# Altium PCB PCB1.PcbDoc
Units mil, origin at the board's own origin, x right, y up, seen from the top; angles counter-clockwise.
Board outline 2500 x 2500 mil, 4 copper layers (PWR, D1, D2, GND), stack 60.119 mil thick; 28 components, 55 nets, 182 pads, 105 vias.
Unrouted connection lines stored in the file: 1.
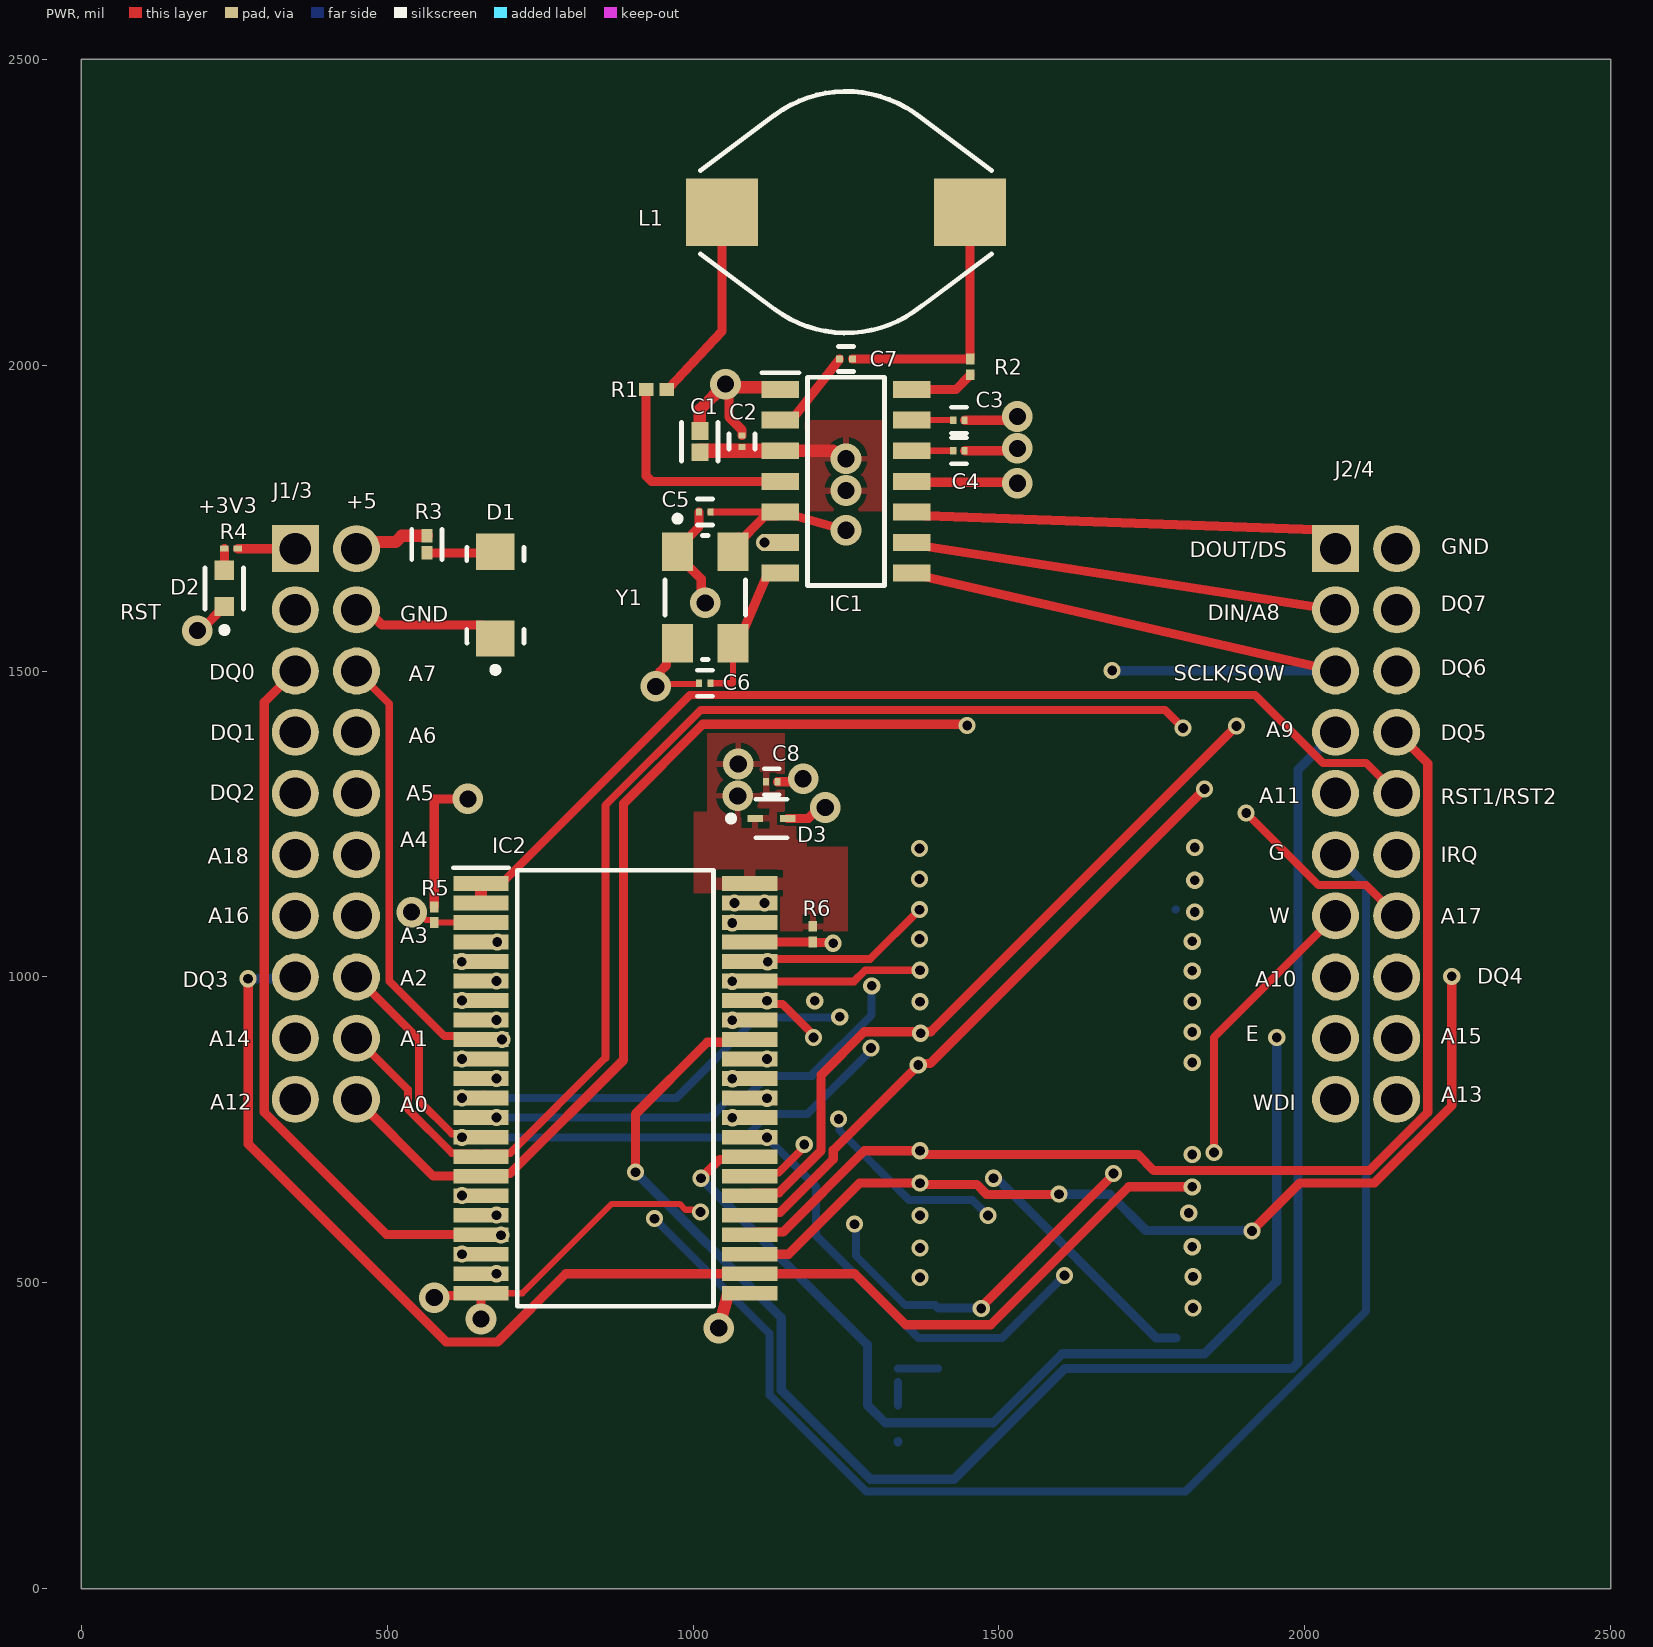
[diagram p0: PWR view]
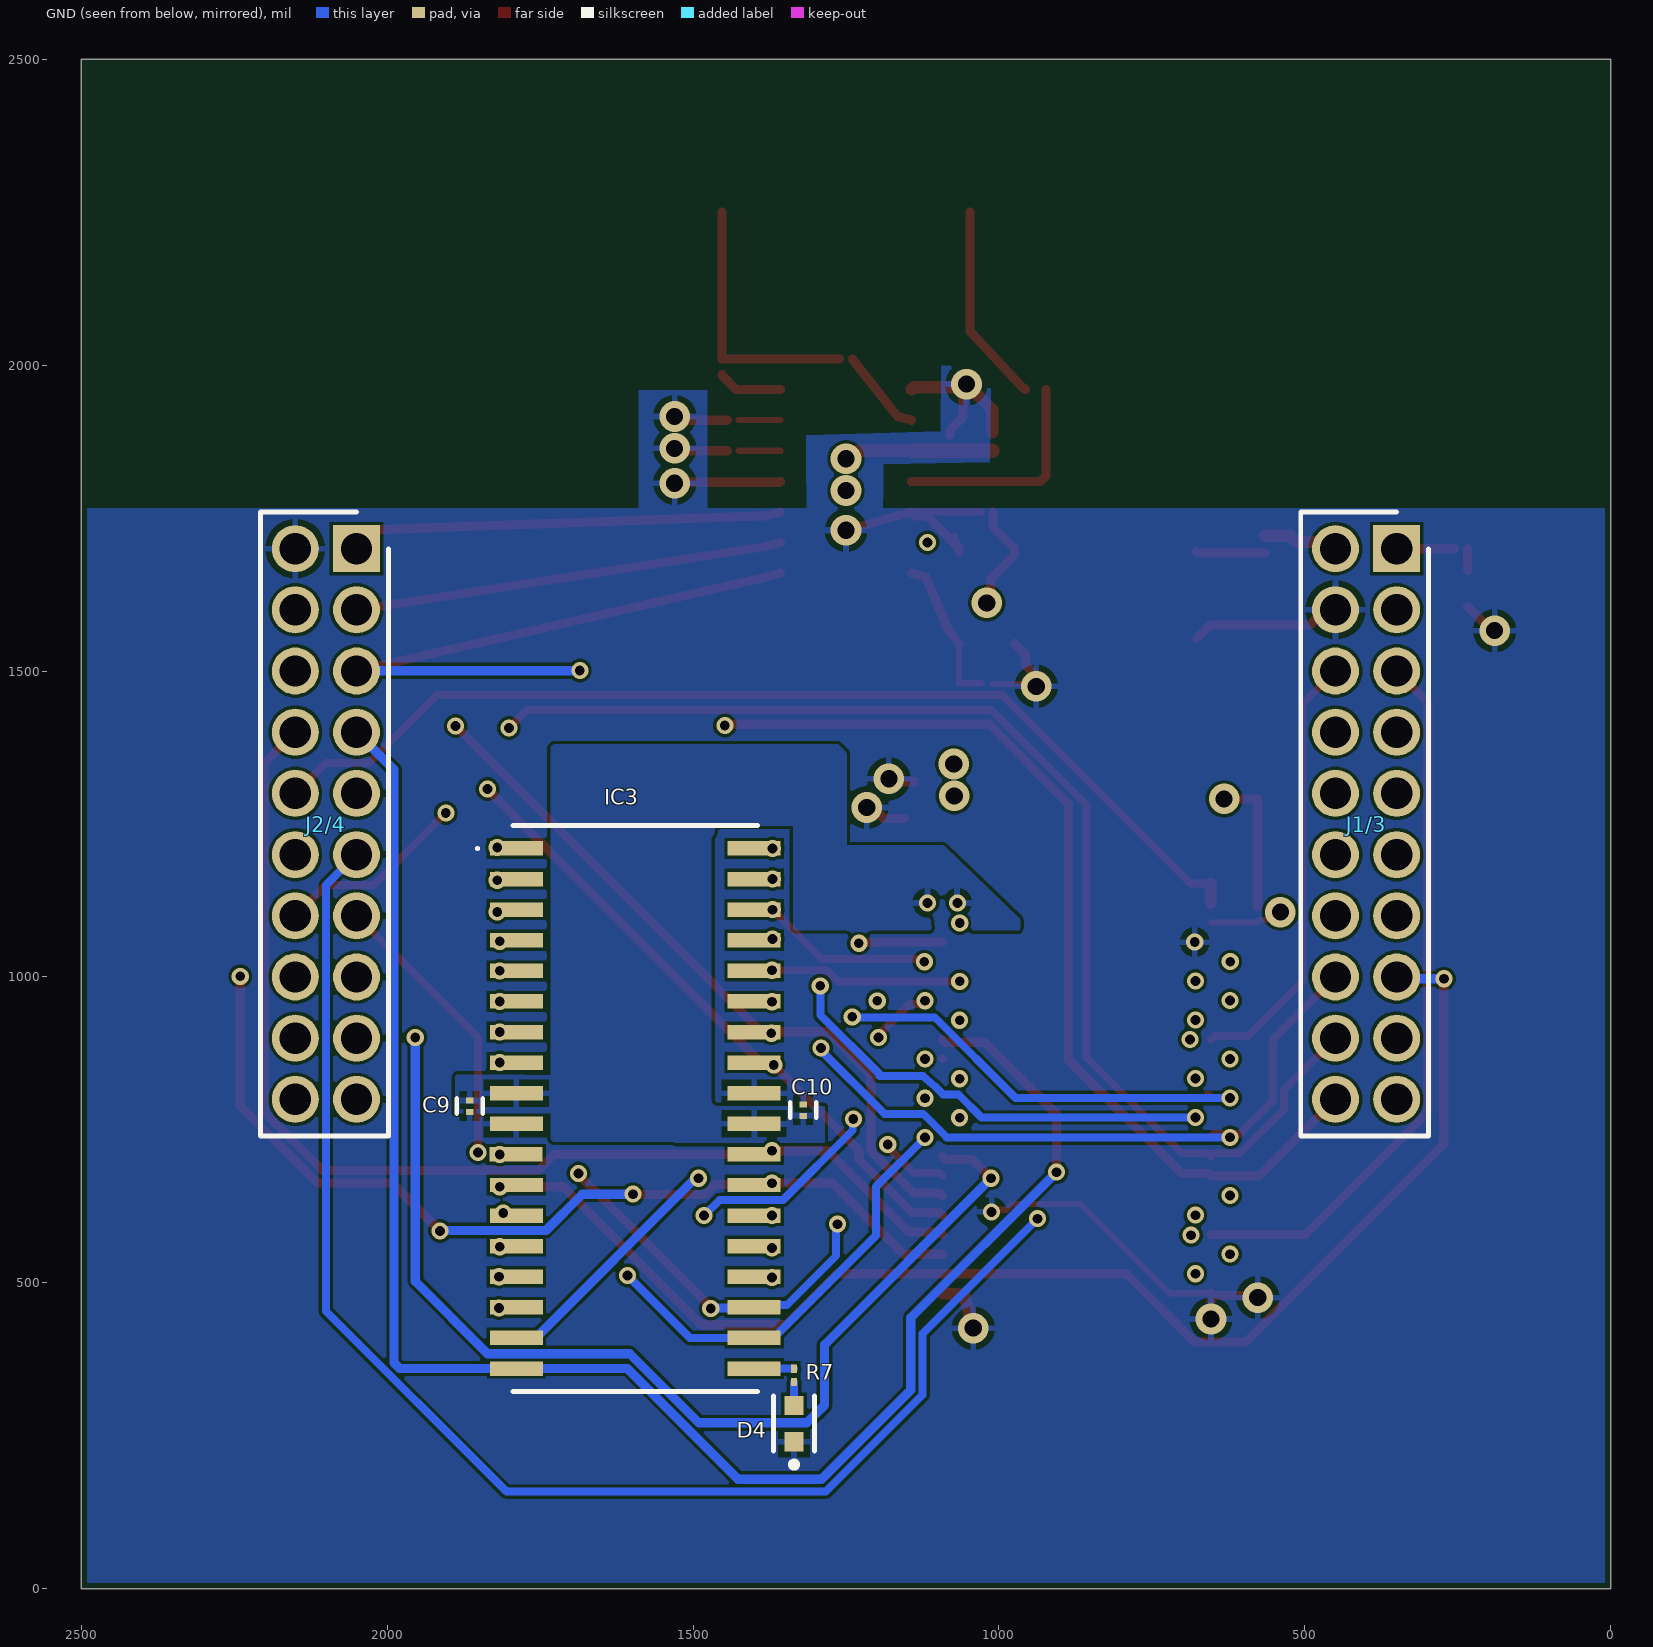
[diagram p1: GND view, seen from below]
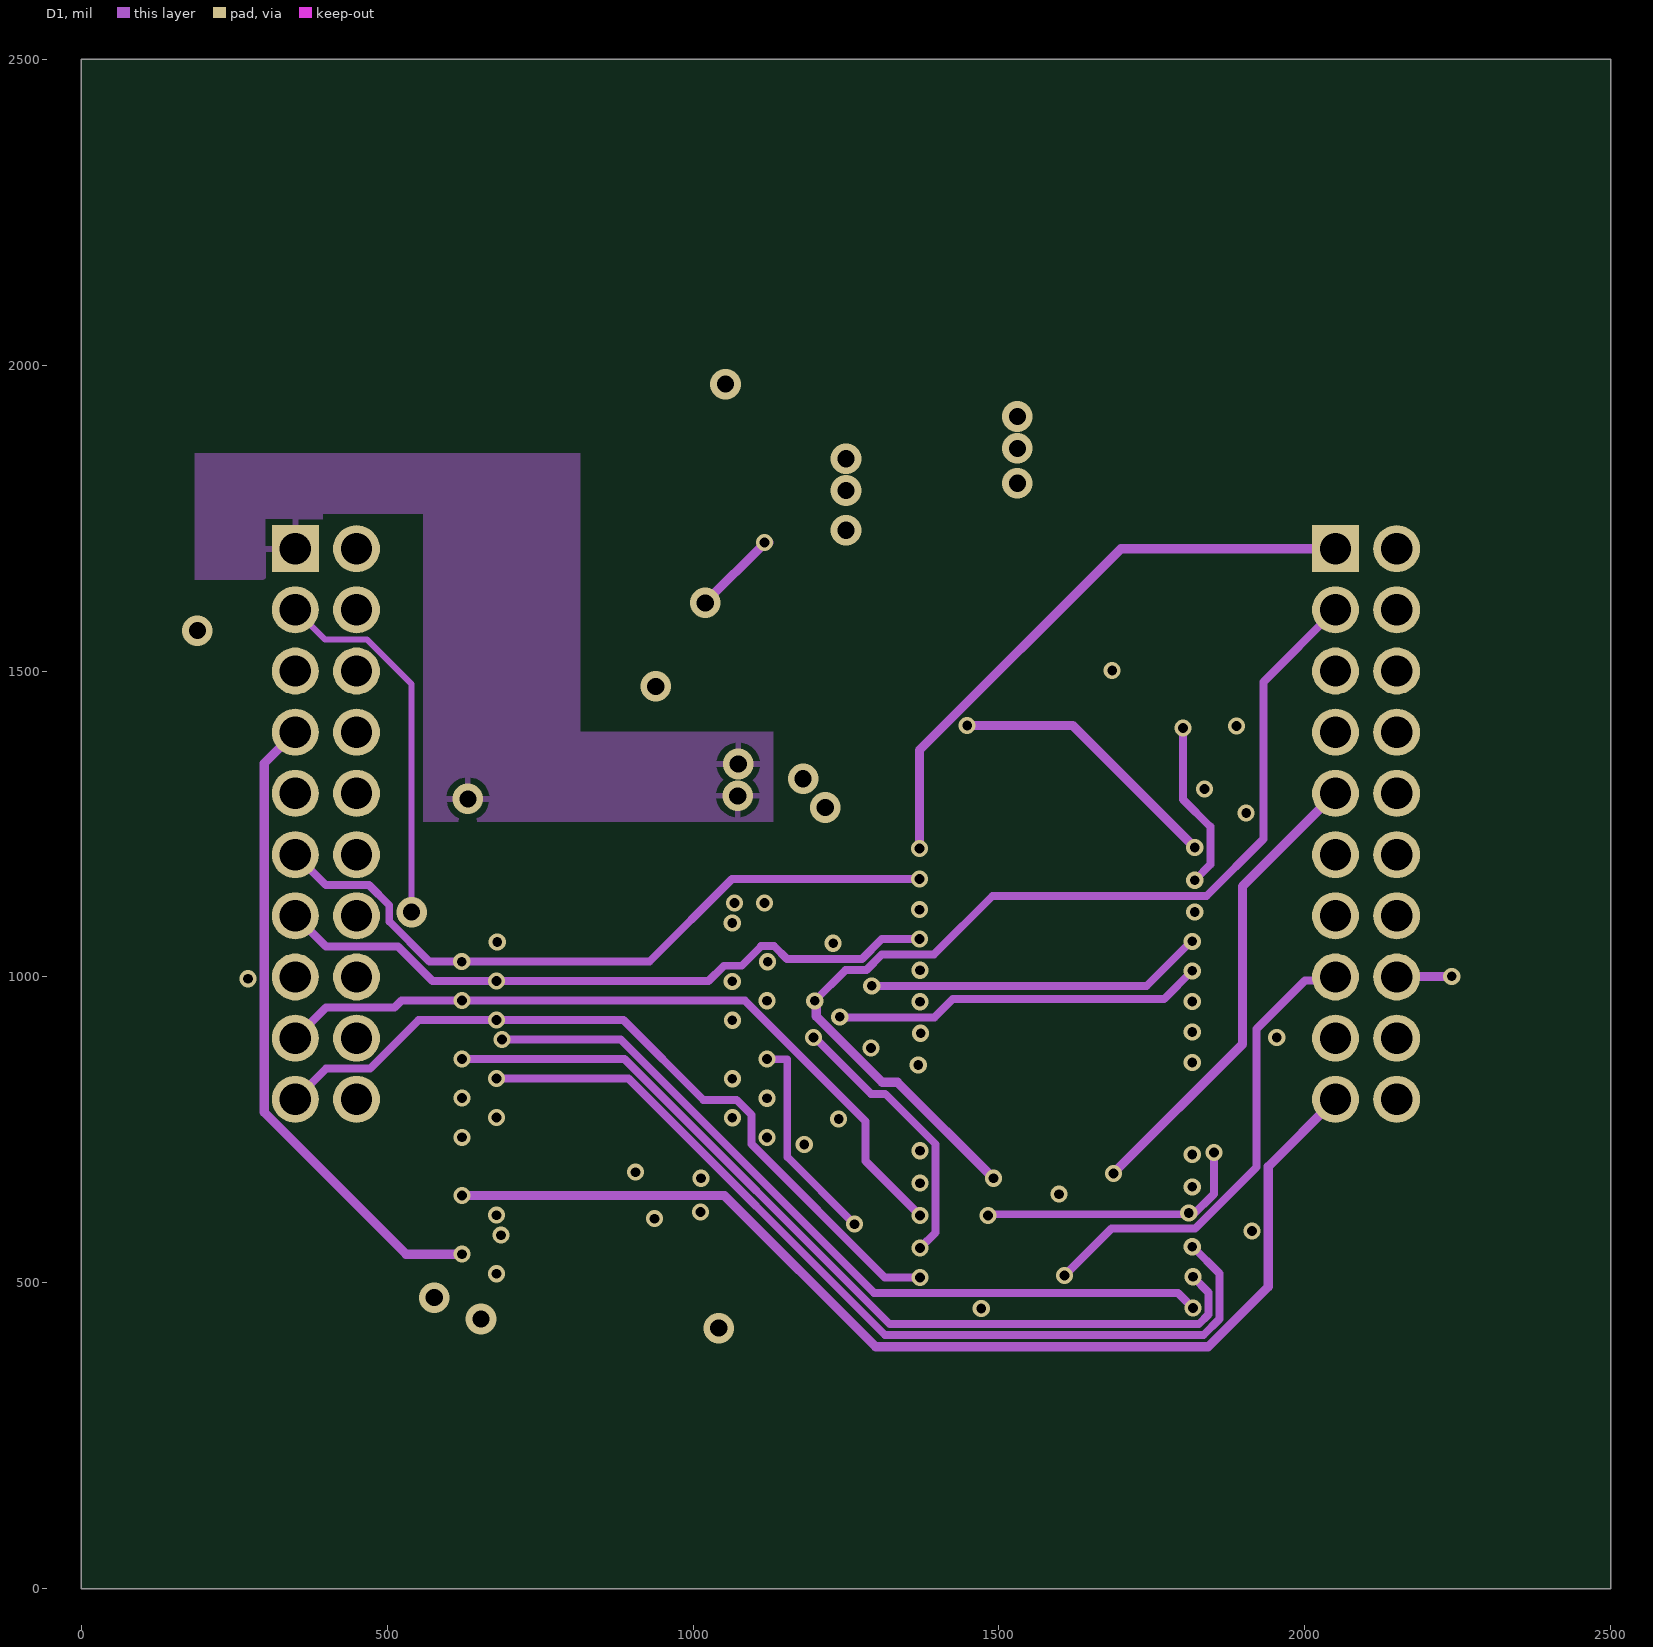
[diagram p2: D1]
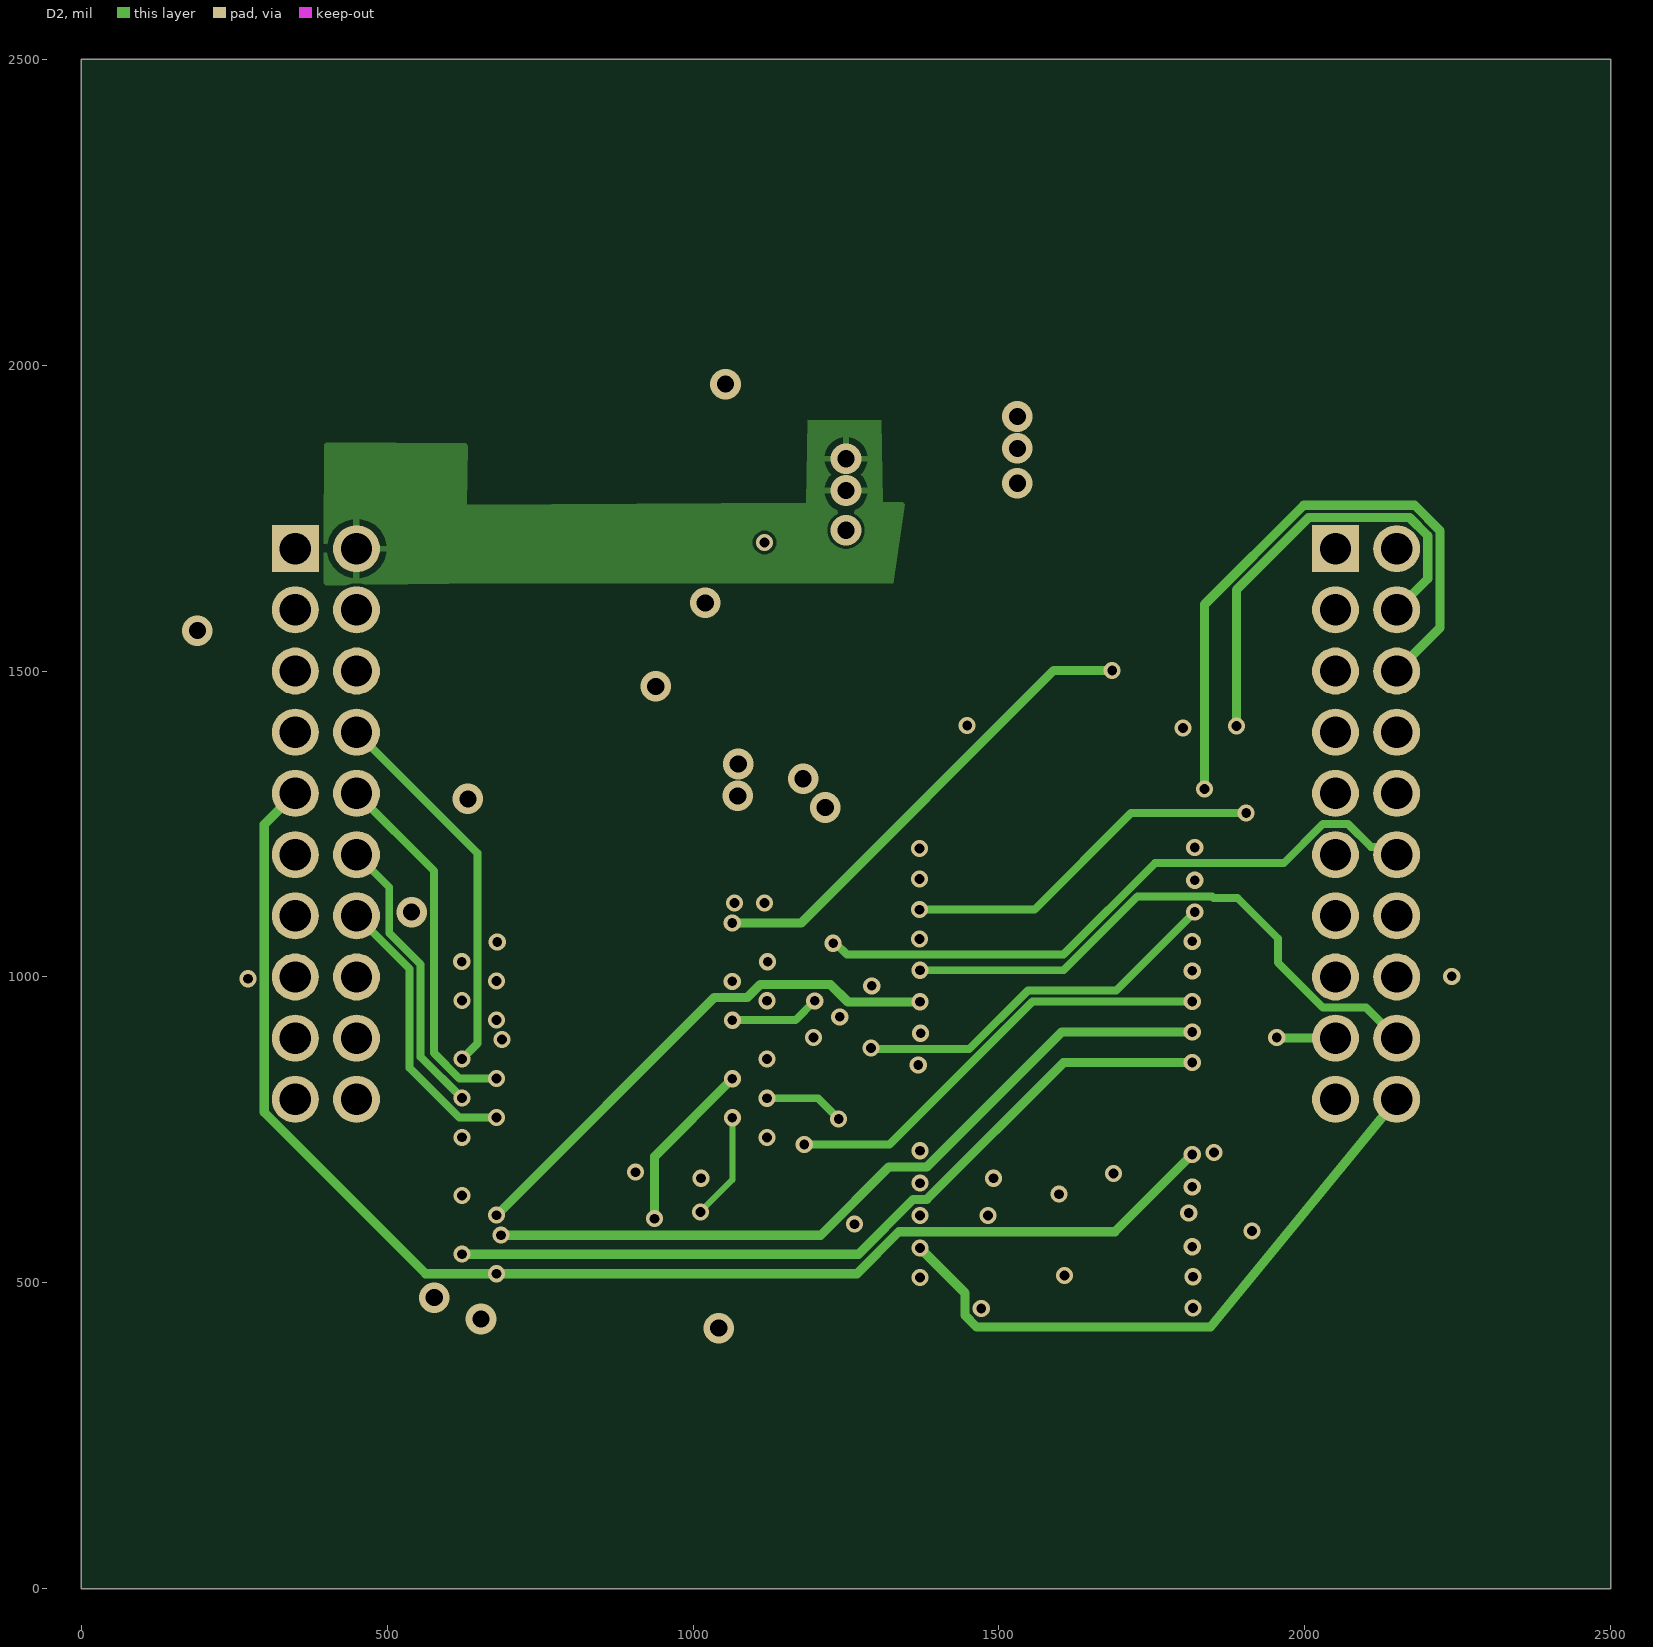
[diagram p3: D2]
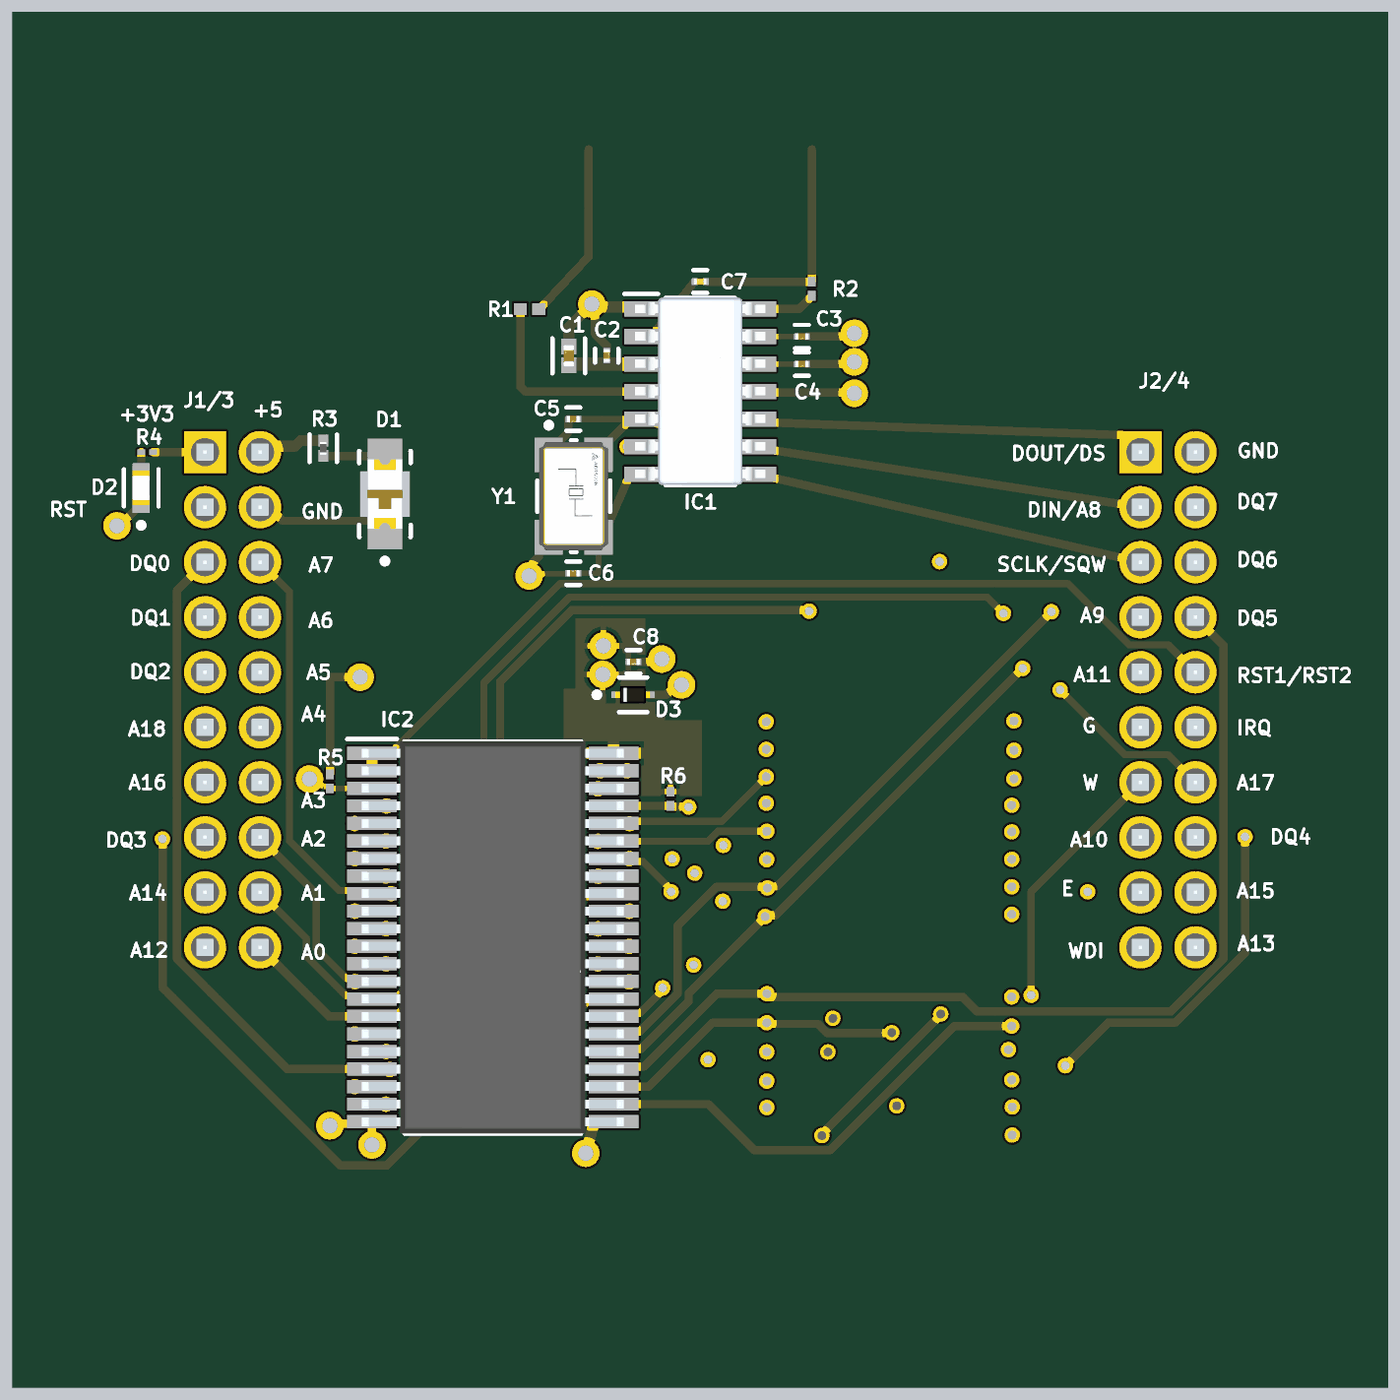
[diagram p4: 3D render of the assembled board from above, using the file's embedded part models]
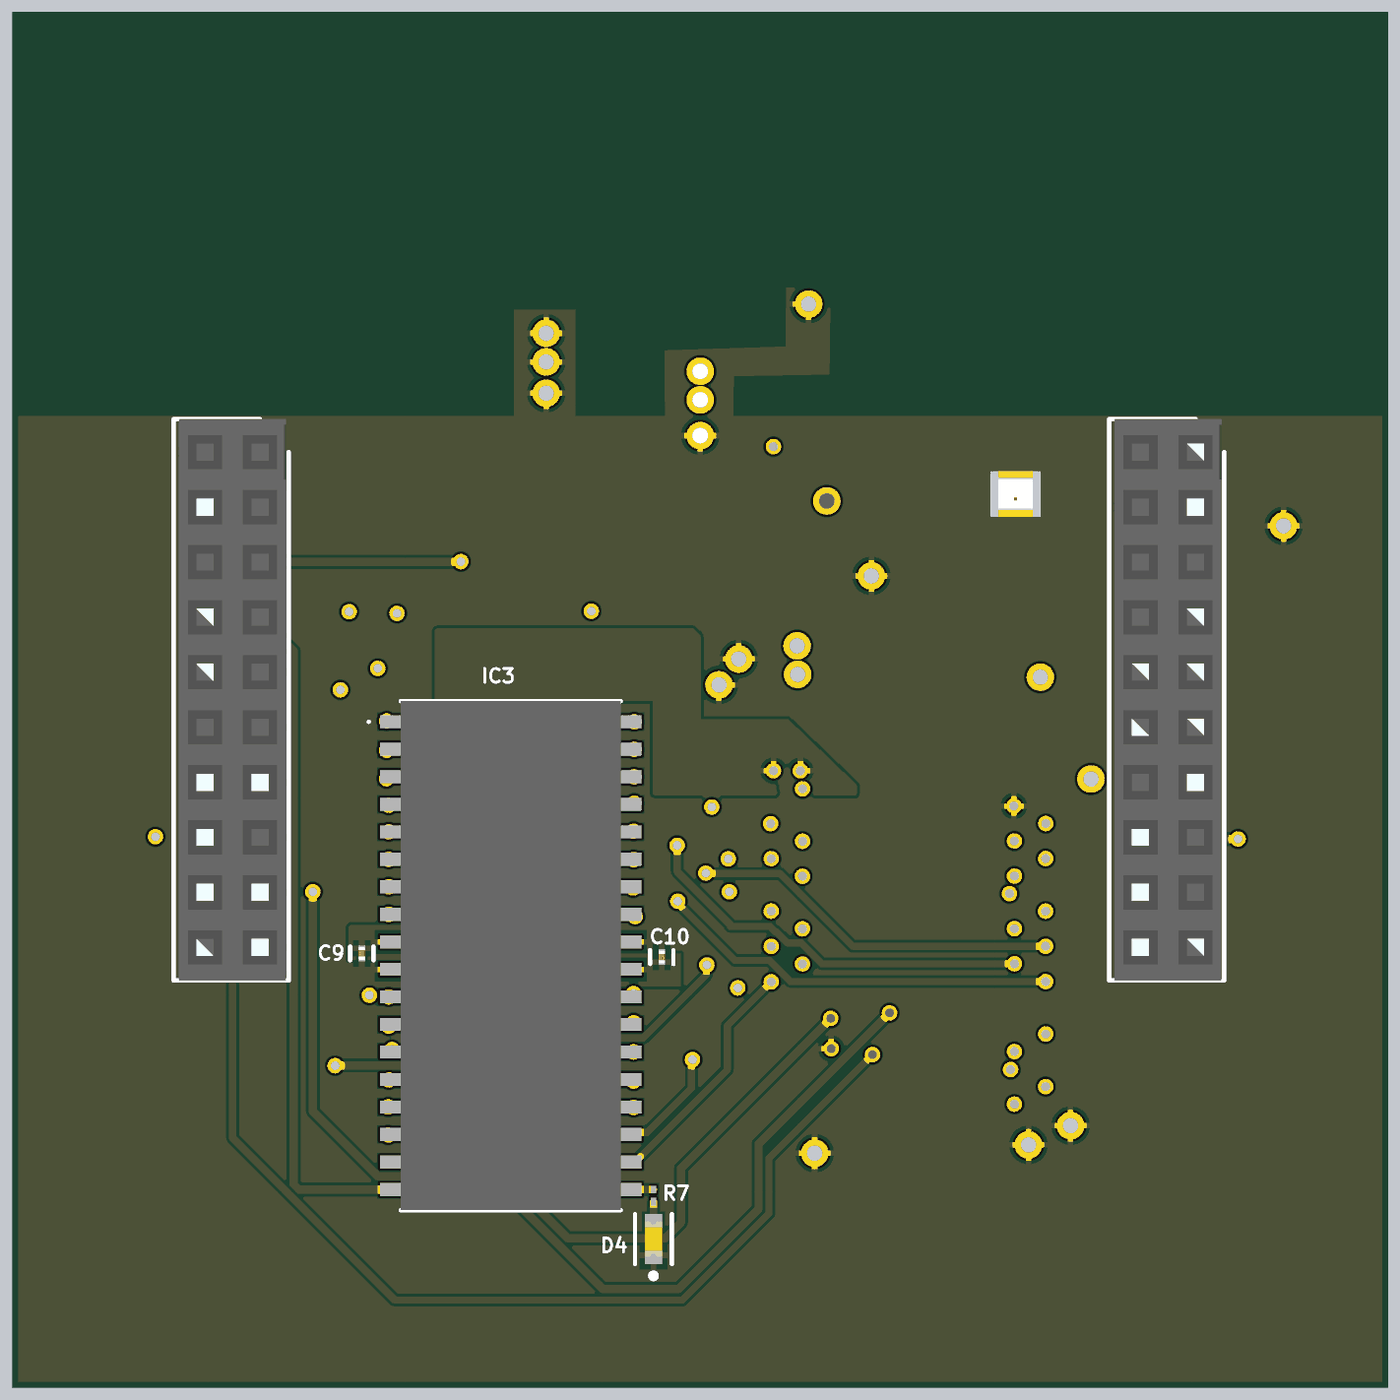
[diagram p5: 3D render of the assembled board from below, using the file's embedded part models]

## Layer stack, top to bottom
Top Solder: solder mask 0.4, Solder Resist, Dk 3.5
PWR: signal copper 0.689
Dielectric 2: prepreg 7.717, PP-006, Dk 4.56
D1: signal copper 1.378
Dielectric 1: dielectric 40.551, FR-4, Dk 4.6
D2: signal copper 1.378
Dielectric 3: prepreg 7.717, PP-006, Dk 4.56
GND: signal copper 0.689
Bottom Solder: solder mask 0.4, Solder Resist, Dk 3.5

## Board outline
0,2500 2500,2500 2500,0 0,0

## Design rules (kind name [scope] priority, off if disabled: settings)
BoardOutlineClearance [All] p1: gap=10 ignorepadtopadclearanceinfootprint=FALSE
Clearance [All] p1: gap=5 ignorepadtopadclearanceinfootprint=FALSE
MinimumSolderMaskSliver [All] p1: minsoldermaskwidth=1
PolygonConnect [All] p1: connectstyle=Relief reliefconductorwidth=10 reliefentries=4 polygonreliefangle="90 Angle" airgapwidth=10
RoutingVias [All] p1: holewidth=16 width=28 viastyle="Through Hole" minholewidth=10 minwidth=20 maxholewidth=28 maxwidth=50
SilkToSilkClearance [All] p1: silktosilkclearance=5
SilkToSolderMaskClearance [IsPad] p1: minsilkscreentomaskgap=5 clearancetoexposedcopper=TRUE
SolderMaskExpansion [All] p1: expansion=4 istentingtop=FALSE
SupplyNets "Schematic Supply Nets_3" [InNet('VOUT')] p1: voltage=0.000
SupplyNets "Schematic Supply Nets_2" [InNet('GND')] p2: voltage=0.000
SupplyNets "Schematic Supply Nets_1" [InNet('+3V3')] p3: voltage=0.000
SupplyNets "Schematic Supply Nets" [InNet('+5')] p4: voltage=0.000
Width [All] p1: maxlimit=30 minlimit=8 preferedwidth=10
27 further rules are at their usual default settings.

## Components (designator, comment, footprint, x,y, rotation, side; value= is the part's Value field where it differs from the comment)
C1 "GRM155R60J106ME44D" FP-GRM155-0_2-IPC_B 1011,1875 r90 top
C2 "GRM033R60J104KE19J" FP-GRM033-0_03-MFG 1080,1875.35 r90 top
C3 "GRM033R60J104KE19J" FP-GRM033-0_03-MFG 1434.65,1910 r0 top
C4 "GRM033R60J104KE19J" FP-GRM033-0_03-MFG 1434.65,1860 r0 top
C5 "GRM0335C1E3R0CA01D" FP-GRM033-0_03-MFG 1019.35,1760 r0 top
C6 "GRM0335C1E3R0CA01D" FP-GRM033-0_03-MFG 1019.35,1480 r180 top
C7 "CC0201KRX7R7BB332" FP-CC0201-BA-MFG 1250,2010 r180 top value="3.3 nF"
C8 "GRM033R60J104KE19J" FP-GRM033-0_03-MFG 1128.65,1319 r0 top
C9 "GRM033R60J104KE19J" FP-GRM033-0_03-MFG 1865,789 r270 bottom
C10 "GRM033R60J104KE19J" FP-GRM033-0_03-MFG 1320,782.35 r90 bottom
D1 "LTST-C230KRKT" FP-LTST-C230KRKT-MFG 677,1624 r90 top
D2 "LTST-C193TBKT-5A" FP-LTST-C193TBKT-5A-MFG 234,1635 r90 top
D3 "BAT41KFILM" FP-SOD-523-MFG 1128,1259 r0 top value=3pF
D4 "LTST-C190KFKT" FP-LTST-C190KFKT-MFG 1335,270 r90 bottom
IC1 "HTRC11001T_03EE,11" SOIC127P600X175-14N 1250,1810 r0 top
IC2 "M48T201V-85MH1F" SOP81P1210X305-44N 873,818 r0 top
IC3 "CY7S1049GE30-10VXI" CY7S1049GE3010VXI 1594.41,785 r270 bottom
J1/3 "SSW-110-23-F-D" RHDR20W79P254_2X10_2591X495X851P 350,1700 r90 bottom
J2/4 "SSW-110-23-F-D" RHDR20W79P254_2X10_2591X495X851P 2050,1700 r90 bottom
L1 "74456247" "WE-PD4_Type L" 51250,52250 r0 top
R1 "ERJ-U020R00X" RESC1005X40X25NL05T10 940,1960 r0 top
R2 "CRCW0201300KFNED" RESC0603X28X15NL05T05 1452.76,1997 r270 top
R3 "RC0603F511CS" FP-RC0603-IPC_A 565,1707 r270 top
R4 "CRCW0201470RFKED" RESC0603X28X15LL05T05 245,1700 r180 top
R5 "CRCW02014K70JNED" RESC0603X28X15NL05T05 577,1101.8 r90 top
R6 "CRCW02014K70JNED" RESC0603X28X15NL05T05 1196,1070 r90 top
R7 "CRCW0201470RFKED" RESC0603X28X15LL05T05 1335,348.83 r90 bottom
Y1 "ABM3BAIG-16.000MHZ-12-D4Z-T" FP-ABM3BAIG-MFG 1020,1620 r270 top

## Footprints (in the part's own frame and the unit in brackets; to place one, negate y for a bottom-side part, rotate by r counter-clockwise, add the part's x,y. Pads: shape width x height; smd on the part's side, far side on the other; paste and mask are expansions set on the pad)
CY7S1049GE3010VXI [mm]
  rect 0.6x2.2 smd: 1(-10.795,-4.938) 2(-9.525,-4.938) 3(-8.255,-4.938) 4(-6.985,-4.938) 5(-5.715,-4.938) 6(-4.445,-4.938) 7(-3.175,-4.938) 8(-1.905,-4.938) 9(-0.635,-4.938) 10(0.635,-4.938) 11(1.905,-4.943) 12(3.175,-4.938) 13(4.445,-4.938) 14(5.715,-4.938) 15(6.985,-4.938) 16(8.255,-4.938) 17(9.525,-4.938) 18(10.795,-4.938) 19(10.795,4.938) 20(9.525,4.938) 21(8.255,4.938) 22(6.985,4.938) 23(5.715,4.938) 24(4.445,4.938) 25(3.175,4.938) 26(1.905,4.938) 27(0.635,4.938) 28(-0.635,4.938) 29(-1.905,4.938) 30(-3.175,4.938) 31(-4.445,4.938) 32(-5.715,4.938) 33(-6.985,4.938) 34(-8.255,4.938) 35(-9.525,4.938) 36(-10.795,4.938)
  silkscreen extent -11.75,-6.6 11.75,5.08, body extent -11.75,-5.08 11.75,5.08, height 3.86
FP-ABM3BAIG-MFG [mm]
  rect 1.6x1.3 smd paste+0 mask+0: 1(-1.9,-1.15) 2(1.9,-1.15) 3(1.9,1.15) 4(-1.9,1.15)
  silkscreen extent -3.4,-1.68 2.58,1.68, body extent -2.8,-1.9 2.8,1.9, height 0.25
FP-CC0201-BA-MFG [mm]
  rect 0.28x0.3 smd paste+0 mask+0: 1(-0.265,0) 2(0.265,0)
  silkscreen extent -0.32,-0.53 0.32,0.53, body extent -0.51,-0.27 0.51,0.27, height 0.25
FP-GRM033-0_03-MFG [mm]
  rect 0.25x0.3 smd paste+0 mask+0: 1(-0.238,0) 2(0.238,0)
  silkscreen extent -0.32,-0.54 0.32,0.54, body extent -0.46,-0.27 0.46,0.27, height 0.25
FP-GRM155-0_2-IPC_B [mil]
  rect 28.67x27.8 smd paste+0 mask+0: 1(-17.28,0) 2(17.28,0)
  silkscreen extent -32,-30 32,30, body extent -38,-20 38,20, height 10
FP-LTST-C190KFKT-MFG [mm]
  rect 0.8x0.8 smd paste+0 mask+0: 1(-0.75,0) 2(0.75,0)
  silkscreen extent -1.82,-0.85 1.15,0.85, body extent -0.8,-0.4 0.8,0.4, height 0.9
FP-LTST-C193TBKT-5A-MFG [mm]
  rect 0.8x0.8 smd paste+0 mask+0: 1(-0.75,0) 2(0.75,0)
  silkscreen extent -1.85,-0.8 0.85,0.8, body extent -1.25,-0.55 1.25,0.55, height 0.25
FP-LTST-C230KRKT-MFG [mm]
  rect 1.5x1.6 smd paste+0 mask+0: 1(-1.8,0) 2(1.8,0)
  silkscreen extent -3.22,-1.19 1.99,1.19, body extent -2.65,-0.95 2.65,0.95, height 0.25
FP-RC0603-IPC_A [mil]
  rect 21.82x18.22 smd paste+0 mask+0: 1(-13.95,0) 2(13.95,0)
  silkscreen extent -25,-25 25,25, body extent -33,-17 33,17, height 10
FP-SOD-523-MFG [mm]
  rect 0.65x0.3 smd paste+0 mask+0: 1(-0.675,0) 2(0.675,0)
  silkscreen extent -1.8,-0.8 0.65,0.8, body extent -1.1,-0.55 1.1,0.55, height 0.25
RESC0603X28X15LL05T05 [mm] "Chip Resistor, 2-Leads, Body 0.60x0.30mm, IPC High Density"
  rect 0.35x0.25 smd: 1(-0.275,0) 2(0.275,0)
  body extent -0.33,-0.17 0.32,0.18, height 0.28
RESC0603X28X15NL05T05 [mm] "Chip Resistor, 2-Leads, Body 0.60x0.30mm, IPC Medium Density"
  rect 0.45x0.35 smd: 1(-0.325,0) 2(0.325,0)
  body extent -0.33,-0.17 0.33,0.18, height 0.28
RESC1005X40X25NL05T10 [mm] "Chip Resistor, 2-Leads, Body 1.00x0.50mm, IPC Medium Density"
  rect 0.6x0.55 smd: 1(-0.425,0) 2(0.425,0)
  body extent -0.53,-0.27 0.53,0.28, height 0.4
RHDR20W79P254_2X10_2591X495X851P [mm]
  rect 1.95x1.95 hole 1.3: 1(0,0)
  round 1.95 hole 1.3: 2(0,2.54) 3(-2.54,0) 4(-2.54,2.54) 5(-5.08,0) 6(-5.08,2.54) 7(-7.62,0) 8(-7.62,2.54) 9(-10.16,0) 10(-10.16,2.54) 11(-12.7,0) 12(-12.7,2.54) 13(-15.24,0) 14(-15.24,2.54) 15(-17.78,0) 16(-17.78,2.54) 17(-20.32,0) 18(-20.32,2.54) 19(-22.86,0) 20(-22.86,2.54)
  silkscreen extent -24.39,-1.33 1.53,3.99, body extent -24.39,-1.21 1.53,3.75, height 8.51
SOIC127P600X175-14N [mm]
  rect 1.55x0.7 smd: 1(-2.725,3.81) 2(-2.725,2.54) 3(-2.725,1.27) 4(-2.725,0) 5(-2.725,-1.27) 6(-2.725,-2.54) 7(-2.725,-3.81) 8(2.725,-3.81) 9(2.725,-2.54) 10(2.725,-1.27) 11(2.725,0) 12(2.725,1.27) 13(2.725,2.54) 14(2.725,3.81)
  silkscreen extent -3.5,-4.33 1.6,4.51, body extent -3,-4.31 3,4.34, height 1.56
SOP81P1210X305-44N [mm]
  rect 2.3x0.61 smd: 1(-5.575,8.505) 2(-5.575,7.695) 3(-5.575,6.885) 4(-5.575,6.075) 5(-5.575,5.265) 6(-5.575,4.455) 7(-5.575,3.645) 8(-5.575,2.835) 9(-5.575,2.025) 10(-5.575,1.215) 11(-5.575,0.405) 12(-5.575,-0.405) 13(-5.575,-1.215) 14(-5.575,-2.025) 15(-5.575,-2.835) 16(-5.575,-3.645) 17(-5.575,-4.455) 18(-5.575,-5.265) 19(-5.575,-6.075) 20(-5.575,-6.885) 21(-5.575,-7.695) 22(-5.575,-8.505) 23(5.575,-8.505) 24(5.575,-7.695) 25(5.575,-6.885) 26(5.575,-6.075) 27(5.575,-5.265) 28(5.575,-4.455) 29(5.575,-3.645) 30(5.575,-2.835) 31(5.575,-2.025) 32(5.575,-1.215) 33(5.575,-0.405) 34(5.575,0.405) 35(5.575,1.215) 36(5.575,2.025) 37(5.575,2.835) 38(5.575,3.645) 39(5.575,4.455) 40(5.575,5.265) 41(5.575,6.075) 42(5.575,6.885) 43(5.575,7.695) 44(5.575,8.505)
  silkscreen extent -6.73,-9.05 4.08,9.16, body extent -6.05,-9.05 6.05,9.05, height 3.05
"WE-PD4_Type L" [mm] "SMD Power Inductor, body 12.7x10mm"
  rect 3x2.8 smd: 1(-1275.15,-1270) 2(-1264.85,-1270)
  silkscreen extent -1276.04,-1275.01 -1263.96,-1264.99, body extent -1276.35,-1275 -1263.65,-1265, height 5.02

## Part data
C1: library part CMP-2000-05265-2, "CAP CER 10UF 6.3V X5R 0402", Capacitance=10uF, Case Code (Imperial)=0402, Case Code (Metric)=1005, Dielectric=X5R, Max Operating Temperature=85°C, Min Operating Temperature=-55°C, Package Quantity=10000, Tolerance=20%, Voltage=6.3V, Case/Package=0402, Depth=0.5mm, Height=0.5mm, Lead Free="Lead Free", Length=1mm, Mount="Surface Mount", Packaging="Tape and Reel", REACH SVHC="No SVHC", RoHS Compliant=Yes, Series=GRM, Termination=SMD/SMT, Thickness=0.022inch, Voltage Rating=6.3V, Voltage Rating (DC)=6.3V, Width=0.5mm
C2 C3 C4 C8 C9 C10: library part CMP-2010-01258-2, "Chip Multilayer Ceramic Capacitors for General Purpose, 0201, 0.10uF, X5R, 15%, 10%, 6.3V", Capacitance=100nF, Case Code (Imperial)=0201, Case Code (Metric)=0603, Dielectric=X5R, Max Operating Temperature=85°C, Min Operating Temperature=-55°C, Package Quantity=50000, Tolerance=10%, Voltage Rating=6.3V, Case/Package=0201, Depth=0.3mm, Height=0.3mm, Lead Free="Lead Free", Length=0.6mm, Mount="Surface Mount", Packaging="Tape and Reel", Radiation Hardening=No, Termination=SMD/SMT, Thickness=0.013inch, Voltage Rating (DC)=6.3V, Width=0.012inch
C5 C6: library part CMP-2010-01368-2, "Chip Multilayer Ceramic Capacitors for General Purpose, 0201, 3.0pF, C0G, 30ppm/°C, 0.25pF, 25V", Capacitance=3pF, Case Code (Imperial)=0201, Case Code (Metric)=0603, Dielectric=C0G, Max Operating Temperature=125°C, Min Operating Temperature=-55°C, Package Quantity=15000, Voltage Rating=25V, Case/Package=0201, Depth=0.3mm, Height=0.3mm, Lead Free="Lead Free", Length=0.6mm, Mount="Surface Mount", Packaging="Tape and Reel", REACH SVHC="No SVHC", Termination=SMD/SMT, Thickness=0.013inch, Voltage Rating (DC)=25V, Width=0.012inch
C7: library part CMP-03422-001270-1, "CAP CER 3300PF 16V X7R 0201", Capacitance="3.3 nF", Manufacturer=Yageo, Package=CC0201-BA, Temperature="-55°C to +85°C", Temperature Characteristic=X7R, Temperature Coefficient=15%, Temperature Range High=+85°C, Temperature Range Low=-55°C, Tolerance=0.1, Voltage Rating="16 V", Automotive=No, Category=Cap, ComponentLink2Description=Datasheet, ComponentLink2URL=http://www.yageo.com/documents/recent/UPY-GPHC_X5R_4V-to-50V_25.pdf, Device Class L1="Passive Components", Device Class L2=Capacitors, Device Class L3="Ceramic Capacitors", Digikey Description="CAP CER 3300PF 16V X7R 0201", Footprint Url=http://www.yageo.com/exep/pages/download/literatures/UPY-C_GEN_24.pdf, Height=0.33mm, Ipc Land Pattern Name=CAPC6030X30, Lead Free=Yes, Manufacturer Part Number=CC0201KRX7R7BB332, Material=Ceramic, Mouser Description="Multilayer Ceramic Capacitors MLCC - SMD/SMT 3.3nF 16V X7R 10%", Octopart=https://octopart.com/cc0201krx7r7bb332-yageo-9292620, RoHS=TRUE
D1: library part CMP-22017-000041-1, "LED RED CLEAR CHIP SMD", Case Code (Imperial)=1206, Case Code (Metric)=3216, Color=Red, Forward Current=30mA, Forward Voltage=2V, Lens Color=Colorless, Max Operating Temperature=85°C, Min Operating Temperature=-55°C, Package Quantity=1, Power Dissipation=75mW, Reverse Voltage=5V, Test Current=20mA, Case/Package=1206, Depth=1.6mm, Dominant Wavelength=631nm, Height=1.1mm, Illumination Color=Red, Lead Free="Lead Free", Length=3.2mm, Lens Style=Diffused, Lens Transparency=Clear, Luminous Intensity=54mcd, Mount="Surface Mount", Number of Elements=1, Number of LEDs=1, Number of Pins=2, Packaging="Tape and Reel", Power Rating=75mW, Radiation Hardening=No, RoHS Compliant=Yes, Viewing Angle=130°, Wavelength=639nm, Width=1.6mm
D2: library part CMP-2000-06624-2, "LED BLUE CLEAR CHIP SMD", Case Code (Imperial)=0603, Case Code (Metric)=1608, Color=Blue, Forward Current=20mA, Forward Voltage=2.8V, Lens Color=Colorless, Max Operating Temperature=80°C, Min Operating Temperature=-20°C, Package Quantity=1, Power Dissipation=76mW, Reverse Voltage=5V, Test Current=5mA, Case/Package=0603, Depth=0.8mm, Dominant Wavelength=475nm, Height=0.35mm, Illumination Color=Blue, Lead Free="Lead Free", Length=1.6mm, Lens Style=Diffused, Lens Transparency=Clear, Luminous Intensity=15mcd, Mount="Surface Mount", Number of Elements=1, Number of LEDs=1, Number of Pins=2, Packaging="Tape and Reel", Radiation Hardening=No, RoHS Compliant=Yes, Viewing Angle=130°, Width=0.8mm
D3: library part CMP-12187-000015-1, "DIODE SCHOTTKY 100V 200MA SOD523", Capacitance=3pF, Forward Current=200mA, Manufacturer=STMicroelectronics, Max Junction Temp=+150°C, Max Repetitive Reverse Voltage=100V, Max Surge Forward Current=1A, Package=SOD-523, Peak Reverse Current=0.1uA, Temperature="to +150°C", Automotive=No, Category=Diode, ComponentLink2Description=Datasheet, ComponentLink2URL=https://www.st.com/resource/en/datasheet/bat41.pdf, Device Class L1="Discrete Semiconductors", Device Class L2=Diodes, Device Class L3="Schottky Diodes", Digikey Description="DIODE SCHOTTKY 100V 200MA SOD523", Height=0.7mm, Lead Free=Yes, Manufacturer Part Number=BAT41KFILM, Mouser Description="Schottky Diodes & Rectifiers schottky diode", Octopart=https://octopart.com/bat41kfilm-stmicroelectronics-658186, RoHS=TRUE, Temperature Range High=+150°C
D4: library part CMP-1674-00008-9, "LED ORANGE CLEAR CHIP SMD", Case Code (Imperial)=0603, Case Code (Metric)=1608, Color=Orange, Forward Current=30mA, Forward Voltage=2V, Lens Color=Colorless, Max Operating Temperature=85°C, Min Operating Temperature=-55°C, Package Quantity=3000, Power Dissipation=75mW, Reverse Voltage=5V, Test Current=20mA, Case/Package=0603, Depth=1.6mm, Dominant Wavelength=605nm, Height=0.9mm, Illumination Color=Orange, Lead Free="Lead Free", Length=3.2mm, Lens Size=0.8mm, Lens Style=Flat, Lens Transparency=Clear, Luminous Intensity=90mcd, Mount="Surface Mount", Number of Elements=1, Number of LEDs=1, Number of Pins=2, Packaging="Tape and Reel", Power Rating=75mW, Radiation Hardening=No, RoHS Compliant=Yes, Series=-, Viewing Angle=130°, Wavelength=611nm, Width=0.8mm
IC1: "Integrated Circuit", Arrow Part Number=HTRC11001T/03EE,11, Manufacturer_Name=NXP, Mouser Part Number=771-HTRC11001TD-T, Arrow Price/Stock=https://www.arrow.com/en/products/htrc11001t03ee11/nxp-semiconductors?region=nac, Datasheet Link=http://www.nxp.com/docs/en/data-sheet/037031.pdf, Height=1.75mm, Manufacturer_Part_Number=HTRC11001T/03EE,11, Mouser Price/Stock=https://www.mouser.co.uk/ProductDetail/NXP-Semiconductors/HTRC11001T-03EE11?qs=me8TqzrmIYXFfehhhz6%2FBA%3D%3D
IC2: "Integrated Circuit", Manufacturer_Name=STMicroelectronics, Mouser Part Number=511-M48T201V-85MH1F, Arrow Part Number=M48T201V-85MH1F, Arrow Price/Stock=https://www.arrow.com/en/products/m48t201v-85mh1f/stmicroelectronics?region=nac, Datasheet Link=https://www.st.com/resource/en/datasheet/m48t201v.pdf, Height=3.05mm, Manufacturer_Part_Number=M48T201V-85MH1F, Mouser Price/Stock=https://www.mouser.co.uk/ProductDetail/STMicroelectronics/M48T201V-85MH1F?qs=du%252Bo5tJIeNJFhGr0KezC0g%3D%3D
IC3: "Integrated Circuit", Manufacturer_Name=Infineon, Mouser Part Number=727-CY7S1049GE300VXI, Arrow Part Number=CY7S1049GE30-10VXI, Arrow Price/Stock=https://www.arrow.com/en/products/cy7s1049ge30-10vxi/infineon-technologies-ag?utm_currency=USD&region=nac, Datasheet Link=https://www.mouser.co.uk/datasheet/2/196/Infineon_CY7C1049G_CY7C1049GE_4_Mbit__512K_words_8-3446047.pdf, Height=3.7592mm, Manufacturer_Part_Number=CY7S1049GE30-10VXI, Mouser Price/Stock=https://www.mouser.co.uk/ProductDetail/Infineon-Technologies/CY7S1049GE30-10VXI?qs=2De2tSDgB02aBHDh7fjT%2FA%3D%3D
J1/3 J2/4: "Connector", Manufacturer_Name=SAMTEC, Mouser Part Number=200-SSW11023FD, Arrow Part Number=SSW-110-23-F-D, Arrow Price/Stock=https://www.arrow.com/en/products/ssw-110-23-f-d/samtec?region=nac, Datasheet Link=http://suddendocs.samtec.com/prints/ssw-1xx-xx-xxx-x-xx-xxx-xx-mkt.pdf, Height=8.51mm, Manufacturer_Part_Number=SSW-110-23-F-D, Mouser Price/Stock=https://www.mouser.co.uk/ProductDetail/Samtec/SSW-110-23-F-D?qs=Cqqh%252BS766wni9CoblzTtAA%3D%3D
L1: library part CMP-0227-00836-2, Ambient Temperature Range High=85°C, Ambient Temperature Range Low=-40°C, Case/Package=Nonstandard, Current Rating=600mA, DC Resistance (DCR)=1.315Ω, Inductance=470µH, Inductance Tolerance=10%, Max Operating Temperature=125°C, Saturation Current=650mA, Self Resonant Frequency=3.1MHz, Test Frequency=100kHz, Composition=Wirewound, Core Material=Ferrite, Depth=10mm, Height=5mm, Height - Seated (Max)=5.3086mm, Length=12.7mm, Max DC Current=600mA, Min Operating Temperature=-40°C, Mount="Surface Mount", NexarPartId=8917319, Number of Pins=2, Packaging="Cut Tape (CT)", REACH SVHC=Unknown, Resistance=1.315Ω, RMS Current (Irms)=600mA, RoHS=Compliant, Series Resistance=1.315Ω, Shielding=Unshielded, Tolerance=10%, Width=10mm
R1: library part CMP-2002-06457-1, Manufacturer=Panasonic, Part Number=ERJ-U020R00X
R2: library part CMP-2004-00445-1, Manufacturer="Vishay Dale", Part Number=CRCW0201300KFNED
R3: library part CMP-13261-005122-1, "Res Thick Film 0201 510Ω 1% 0.05W ±250ppm/°C Molded SMD T/R", Case Code (Imperial)=0201, Case Code (Metric)=0603, Max Operating Temperature=125°C, Max Power Dissipation=50mW, Min Operating Temperature=-55°C, Resistance=510R, Temperature Coefficient=250ppm/°C, Tolerance=1%, Voltage Rating (DC)=25V, Case/Package=0201, Composition="Thick Film", Contact Plating=Tin, Features="Moisture Resistant", Height=0.01inch, Lead Free="Lead Free", Length=0.024inch, Number of Terminations=2, Packaging="Tape and Reel", Radiation Hardening=No, Width=0.012inch
R4 R7: library part CMP-2004-00629-1, Manufacturer="Vishay Dale", Part Number=CRCW0201470RFKED
R5 R6: library part CMP-2004-00673-1, Manufacturer="Vishay Dale", Part Number=CRCW02014K70JNED
Y1: library part CMP-27762-006368-1, "Automotive & Industrial Grade Crystal 16MHz ±30ppm 12pF SMD-4 5mm x 3.2mm"

## Via types
v1: diameter 28, hole 16, PWR to GND, 86 vias
v2: diameter 50, hole 28, PWR to GND, 19 vias

## Nets (pads, with @x,y where several pads share a name; then routed paths per layer and width w, separated by ;. In a path a pad name is that pad's centre, name@x,y a point inside that pad or via, vN(x,y) a via of type N, cw(c..) or ccw(c..) an arc to the next point about the centre after c; other vN are vias at no path point)
+3V3: C8.1 D3.1 IC2.44 J1/3.1 R4.1 R5.2 R6.2 | length 325.6
  PWR w15: R4.1 J1/3.1 ; R5.2 577,1291 v2(632,1291)
  other v2: 1073,1296 1074,1348
+5: C1.1 C2.1 IC1.3 J1/3.2 R3.1 | length 368.2
  PWR w15: C1.1@1011,1859.69 C1.1@1011.16,1859.84 ; IC1.3@1142.56,1859.84 IC1.3
  PWR w20: J1/3.2 460.86,1710.86 514.02,1710.86 524.11,1720.95 R3.1 ; IC1.3 1228.88,1860 1241.88,1847 v2(1250,1847)
  PWR w24: C1.1@1011.16,1859.84 IC1.3@1142.56,1859.84
  other v2: 1250,1795
A0: IC2.16 IC3.1 J1/3.20 | length 2056.8
  PWR w15: J1/3.20 575.5,674.5 IC2.16 658.02,679 701.09,679 886.29,864.2 886.29,1283.29 1016,1413 1446,1413 v1(1448,1411)
  D1 w15: v1(1448,1411) 1620.5,1411 v1(1820,1211.5)
A1: IC2.15 IC3.2 J1/3.18 | length 2284.2
  PWR w13: J1/3.18 534.27,815.73 534.27,783.97 606.35,711.89 648,711.89 IC2.15 659.02,711.89 700.68,711.89 856.65,867.87 856.65,1280.52 1012.63,1436.5 1771.5,1436.5 v1(1801,1407) ; v1@1819.86,1156.14 v1@1820.05,1156.14
  D1 w13: v1(1801,1407) 1801,1290.1 1845.5,1245.6 1845.5,1183.6 v1(1820.05,1158.14)
A2: IC2.14 IC3.3 J1/3.16 | length 1725.7
  PWR w13: J1/3.16 552.27,897.73 552.27,797.86 606.35,743.78 648,743.78 IC2.14
  D2 w13: v1(1290.85,883.85) 1292.69,882 1451.24,882 1547.24,978 1691.69,978 v1(1820.05,1106.35)
  GND w13: v1(622.24,737.89) 1085.43,737.89 1123.82,776.28 1187.28,776.28 1290.85,879.85 v1(1290.85,883.85) ; IC3.3 IC3.3@1789.49,1110.68
A3: IC2.13 IC3.4 J1/3.14 | length 1742.5
  D1 w13: v1(1292,985.5) 1741.5,985.5 1814.24,1058.24 v1(1816,1058.24)
  D2 w13: J1/3.14 536.94,1013.06 536.94,851.29 618.06,770.16 v1(679,770.16)
  GND w13: v1(679,770.16) 1028.45,770.16 1066.45,808.17 1091.33,808.17 1102.97,819.81 cw(c1121,801.78) 1104.43,821.16 1124.39,838.24 1195.3,838.24 ; 1195.3,841.24 1292,937.94 v1(1292,985.5)
A4: IC2.12 IC3.5 J1/3.12 | length 1756.3
  PWR w15: IC2.12 IC2.12@658.02,806.56
  D1 w13: v1(1239.85,934.85) 1240.69,934 1394.5,934 1424.5,964 1770,964 v1(1816,1010)
  D2 w13: J1/3.12 503.5,1146.5 503.5,1071.96 554.94,1020.52 554.94,869.35 622.24,802.05 v1(622.5,802.05)
  GND w13: v1(622.5,802.05) 973.01,802.05 1104.96,934 1239,934 v1(1239.85,934.85)
A5: IC2.11 IC3.14 J1/3.10 | length 2099.9
  D1 w13: v1(679,833.95) 894.6,833.95 1314.04,414.5 1834.02,414.5 1860.5,440.98 1860.5,515.5 1816.83,559.17 v1(1816,559.17)
  D2 w13: J1/3.10 576.5,1173.5 576.5,875.51 618.06,833.95 v1(679,833.95)
A6: IC2.10 IC3.15 J1/3.8 | length 2104.7
  D1 w13: v1(622.5,865.84) 888.17,865.84 1321.5,432.5 1826.56,432.5 1842.5,448.44 1842.5,484.5 v1(1817,510)
  D2 w13: J1/3.8 647.74,1202.26 647.74,891.34 622.5,866.1 v1(622.5,865.84)
A7: IC2.9 IC3.16 J1/3.6 | length 2029.1
  PWR w13: J1/3.6 503.5,1446.5 503.5,993.5 593.77,903.23 648,903.23 IC2.9
  D1 w13: v1(688,897.72) 881.84,897.72 1296.06,483.5 1792.5,483.5 v1(1817,459)
A8: IC1.9 IC2.37 IC3.17 J2/4.3 | length 2946.9
  PWR w15: IC1.9 1380.3,1703.72 J2/4.3
  D1 w13: v1(1199,961) 1249.5,1011.5 1283.39,1011.5 1308.39,1036.5 1393.55,1036.5 1489.7,1132.64 1839.45,1132.64 1932.18,1225.37 1932.18,1482.18 J2/4.3
  D1 w15: v1(1199,961) 1201.49,958.51 1201.49,935.73 1309.16,828.05 1333.95,828.05 v1(1491,671)
  D2 w13: v1(1064.24,929.34) 1167.34,929.34 v1(1199,961)
  GND w15: v1(1491,671) 1493.49,668.51 1498.81,668.51 1757.32,410 IC3.17
A9: IC2.36 IC3.18 J2/4.7 | length 2826.5
  PWR w15: v1(906,681) 906,776 1023.22,893.22 1087.98,893.22 IC2.36
  GND w15: v1(906,681) 1144.04,442.96 1144.04,324.96 1290,179 1426.43,179 1607.43,360 IC3.18 1979.21,360 1989,369.79 1989,1339 J2/4.7
A10: IC2.31 IC3.20 J2/4.15 | length 1488.1
  D1 w13: v1(1607,512) 1683.87,588.87 1820.74,588.87 1921.03,689.17 1921.03,915.03 2000.07,994.07 2044.07,994.07 J2/4.15
  GND w13: v1(1121,737.39) 1200.89,657.5 1200.89,577.61 1368.5,410 IC3.20 1505,410 v1(1607,512)
A11: IC2.35 IC3.21 J2/4.9 | length 1724.8
  PWR w13: IC2.35 IC2.35@1093.07,866.42
  PWR w15: v1(1471,458) 1471,460.5 1687,676.5 v1(1687,679)
  D1 w13: v1(1121,865.84) 1154,865 1154,706 v1(1264,596)
  D1 w15: v1(1687,679) 1898,890 1898,1148 J2/4.9
  GND w13: v1(1264,596) 1266,594 1266,544.44 1346.88,463.57 1396.43,463.57 IC3.21@1401,459
  GND w15: IC3.21 1401,459 1470,459 v1(1471,458)
A12: IC2.8 IC3.22 J1/3.19 | length 1276.9
  D1 w13: J1/3.19 400.11,850.11 472.11,850.11 551.61,929.61 v1(679,929.61) 886.29,929.61 1016.73,799.17 1071.01,799.17 1095.5,774.69 1095.5,726.83 1313.33,509 v1(1371,509)
A13: IC2.38 IC3.23 J2/4.20 | length 1585.5
  PWR w13: v1(1121,961.23) 1126.23,956 1146,956 1197.02,904.98 v1(1197.02,901.02)
  D1 w13: v1(1197.02,901.02) 1198.99,901.02 1290.96,809.05 1314.01,809.05 1396.5,726.56 1396.5,582.5 v1(1371,557)
  D2 w15: v1(1371,557) 1444.5,483.5 1444.5,447.02 1463.78,427.74 1845.64,427.74 J2/4.20
A14: IC2.7 IC3.24 J1/3.17 | length 1230.2
  D1 w13: J1/3.17 400.11,950.11 511.96,950.11 523.35,961.5 v1(622.24,961.5) 1084.66,961.5 1282,764.17 1282,699 v1(1371,610)
A15: IC2.39 IC3.32 J2/4.18 | length 1262.7
  PWR w13: v1(1064,992.84) 1263.27,992.84 1281.44,1011 v1(1371,1011)
  D2 w13: v1(1371,1011) 1605.46,1011 1726.31,1131.85 1848.27,1131.85 1850.77,1129.35 1889.56,1129.35 1955.7,1063.21 1955.7,1023.75 2029.34,950.11 2099.89,950.11 J2/4.18
A16: IC2.6 IC3.33 J1/3.13 | length 1109.8
  D1 w13: J1/3.13 400.11,1049.89 517.91,1049.89 574.4,993.39 v1(679,993.39) 1025.48,993.39 1050.42,1018.34 1079.44,1018.34 1111.44,1050.34 1132.56,1050.34 1153.4,1029.5 1275.94,1029.5 1308.44,1062 v1(1370,1062)
A17: IC2.40 IC3.34 J2/4.14 | length 1198.3
  PWR w13: v1(1122,1024.84) 1126.16,1029 1289,1029 v1(1370,1110) ; v1(1904,1268) 2021.89,1150.11 2099.89,1150.11 J2/4.14
  D2 w13: v1(1370,1110) 1558,1110 1716,1268 v1(1904,1268)
A18: IC2.5 IC3.35 J1/3.11 | length 1163.7
  D1 w13: J1/3.11 399.89,1150.11 470.44,1150.11 503.5,1117.05 503.5,1090.88 569.38,1025 v1(622,1025) 928.5,1025 1063.5,1160 v1(1370,1160)
DOUT: IC1.10 IC3.36 J2/4.1 | length 1771.1
  PWR w15: IC1.10 1380.3,1753.72 2019.11,1730.89 J2/4.1
  D1 w15: v1(1370,1210) 1370,1370.48 1699.52,1700 J2/4.1
  D2 w15: J2/4.1@2019.11,1669.11 J2/4.1
  GND w15: J2/4.1@2019.11,1669.11 J2/4.1
DQ0: IC2.19 IC3.7 J1/3.5 | length 2447
  PWR w15: J1/3.5 299.11,1449.11 299.11,778.92 499.21,578.83 IC2.19
  D2 w15: v1(686,578) 1208.52,578 1320.02,689.5 1381.98,689.5 1602.48,910 v1(1816,910)
DQ1: IC2.20 IC3.8 J1/3.7 | length 2384.8
  D1 w15: J1/3.7 299.11,1349.11 299.11,778.92 531.1,546.94 v1(622.24,546.94)
  D2 w15: v1(622.24,546.94) 1270.46,546.94 1360.02,636.5 1381.98,636.5 1605.48,860 v1(1816,860)
DQ2: IC2.21 IC3.11 J1/3.9 | length 2249.1
  D2 w15: J1/3.9 299.11,1249.11 299.11,778.92 562.99,515.05 v1(679,515.05) 1268.05,515.05 1336.5,583.5 1689.5,583.5 v1(1816,710)
DQ3: IC2.24 IC3.12 J1/3.15 | length 2199.5
  PWR w15: v1@273,996.61 273,726.97 596.47,403.5 680.5,403.5 792.05,515.05 IC2.24 1264.35,515.05 1347.89,431.5 1486.5,431.5 1712,657 v1(1816,657)
  GND w15: v1(272.61,997) 347,997 J1/3.15
DQ4: IC2.25 IC3.25 J2/4.16 | length 1614
  PWR w15: IC2.25 1155.94,546.94 1272,663 v1(1371,663) ; v1@1371,661 1463.52,661 1480.02,644.5 1597.5,644.5 v1(1598,645) ; v1(1913.5,585) 1992,663.5 2113.75,663.5 2240,789.75 v1(2240,1001)
  D1 w15: J2/4.16 2150.5,1000.5 2239.5,1000.5 v1(2240,1001)
  GND w15: v1(1598,645) 1681.02,645 1740.35,585.67 1912.83,585.67 v1(1913.5,585)
DQ5: IC2.26 IC3.26 J2/4.8 | length 1857.9
  PWR w15: IC2.26 1096.83,583.17 1147.25,583.17 1280.08,716 v1(1371,716) ; v1@1371,710 1726.74,710 1753.24,683.5 2105.46,683.5 2200.89,778.92 2200.89,1349.11 J2/4.8
DQ6: IC2.27 IC3.29 J2/4.6 | length 2070.4
  PWR w15: IC2.27 1097,615.22 1142.27,615.22 1229.05,702 1229.05,717.05 v1(1368,856) 1370.49,858.49 1387.49,858.49 v1(1836,1307)
  D2 w15: v1(1836,1307) 1836,1608.73 1998.15,1770.89 2179.36,1770.89 2220.89,1729.36 2220.89,1570.89 J2/4.6
DQ7: IC2.28 IC3.30 J2/4.4 | length 1926.5
  PWR w15: IC2.28 1097,647.11 1140.07,647.11 1209.05,716.09 1209.05,839.52 1279.87,910.35 1369.65,910.35 v1(1372,908) 1374.49,910.49 1388.49,910.49 v1(1888,1410)
  D2 w15: v1(1888,1410) 1888,1632.45 2006.44,1750.89 2171.08,1750.89 2200.89,1721.08 2200.89,1650.89 J2/4.4
E: IC2.30 J2/4.17 | length 1849.3
  PWR w15: v1(1013,671) 1043.88,701.88 1087.98,701.88 IC2.30
  D2 w15: v1(1954,901) 1954.5,900.5 2049.5,900.5 J2/4.17
  GND w15: v1(1013,671) 1284.98,399.02 1284.98,300.37 1314.07,271.28 1490.43,271.28 1603.46,384.31 1835.93,384.31 1954,502.39 v1(1954,901)
ECON: IC2.29 IC3.6 | length 844.2
  PWR w13: IC2.29 1098,680 1139.65,680 1178.87,719.22 1178.87,723.39 v1(1181.74,726.26)
  D2 w13: v1(1181.74,726.26) 1320.96,726.26 1554.7,960 v1(1816,960)
G: IC2.34 J2/4.11 | length 2573.5
  D2 w15: v1@937,608 937,706.43 v1(1064.24,833.67)
  GND w13: v1(937,605) 1125.04,416.96 1125.04,317.09 1283.13,159 1805.08,159 2099.89,453.8 2099.89,1150.11 J2/4.11
GCON: IC2.18 IC3.31 | length 860.3
  D2 w15: v1(679,610.72) 1034.62,966.34 1088.63,966.34 1110.02,987.73 1224.44,987.73 1253.17,959 1370.5,959 v1(1371,959.5)
GND: C1.2 C2.2 C3.2 C4.2 C5.2 C6.2 C8.2 C9.2 C10.2 D1.1 D2.1 D3.2 D4.1 IC1.1 IC1.5 IC1.11 IC2.4 IC2.22 IC2.23 IC2.32 IC3.10 IC3.28 J1/3.4 J2/4.2 Y1.2 Y1.4 | length 2379.2
  PWR w10: IC2.22 721.16,483.16 867,629 978,629 987.56,619.44 1008.56,619.44 v1(1012,616) ; v2(939,1475) 943.09,1479.09 1009.92,1479.09 1010,1479.17 C6.2
  PWR w12: C5.2 IC1.5
  PWR w15: v2(190,1566) 194.53,1566 D2.1 ; J1/3.4 466.72,1600 491.55,1575.16 654.97,1575.16 D1.1 ; v2(577,476) 580.58,479.58 649.93,479.58 IC2.22 v2(653.51,441) ; v2(939,1475) 945.7,1481.7 945.7,1498.9 956.63,1509.83 956.63,1527.11 Y1.2 ; v2@1058.74,1963.26 1058.74,1915.14 1080,1893.88 C2.2 ; Y1.4@1074,1718.8 Y1.4@1068.65,1704.08 ; C8.2 1175,1319 v2(1180,1324) ; D3.2 1188.53,1259 1206.53,1277 v2(1216,1277) ; v2(1250,1730) 1165.73,1753.72 IC1.5 1136.44,1753.72 1118.29,1753.72 Y1.4@1068.65,1704.08 ; IC1.11 1358.78,1808.5 1528.5,1808.5 v2(1530,1807) ; C4.2 1526,1860 v2(1530,1864) ; C3.2 1524,1910 v2(1530,1916) ; Y1.4@1068.65,1704.08 Y1.4 1065.28,1700.71 Y1.4@1068.65,1704.08
  PWR w20: C1.2@1011,1890.31 1011,1927 v2(1053,1969) v2@1058.22,1963.78 ; v2(1042,426) 1057.21,481.15 IC2.23 ; v2@1058.74,1963.26 v2@1058.22,1963.78 ; IC1.1 1138.94,1963.78 v2@1058.22,1963.78
  D2 w10: v1(1012,616) 1064.24,668.24 v1(1064.24,769.89)
  GND w15: D4.1@1334.76,240.24 D4.1
  other v1: 680,1057
IRQ: IC2.41 J2/4.12 R6.1 | length 1175.4
  PWR w15: IC2.41 R6.1 1196,1056.71 1196.61,1056.1 1227.9,1056.1 v1(1229,1055)
  D2 w13: v1(1229,1055) 1233.06,1055 1251.56,1036.5 1605.5,1036.5 1755,1186 1965.45,1186 2029.34,1249.89 2070.66,1249.89 2108.35,1212.2 2137.8,1212.2 J2/4.12
NetC3_1: C3.1 IC1.13 | length 68
  PWR w10: IC1.13 C3.1
NetC4_1: C4.1 IC1.12 | length 68
  PWR w10: IC1.12 C4.1
NetC7_1: C7.1 L1.2 R2.1 | length 432.6
  PWR w15: C7.1 1260.64,2009.8 R2.1 L1.2
NetD1_2: D1.2 R3.2 | length 112.8
  PWR w15: R3.2 675.18,1693.05 D1.2
NetD2_2: D2.2 R4.2 | length 35.5
  PWR w15: D2.2 234.17,1664.7 R4.2
NetD4_2: D4.2 R7.1 | length 38.5
  GND w13: D4.2 R7.1
NetIC3_19: IC3.19 R7.2 | length 65.1
  GND w13: R7.2 1335.17,359.83 1399.83,359.83 IC3.19
NetL1_1: L1.1 R1.2 | length 326.2
  PWR w15: R1.2 961.04,1963.33 1047.24,2055.43 L1.1
RST: IC2.3 J1/3.3 R5.1 | length 734.5
  PWR w10: v2(540,1106) 550.82,1106 563.97,1092.86 575.11,1092.86 577,1090.97 R5.1 ; R5.1 IC2.3@653.48,1089.03
  D1 w10: J1/3.3 398.39,1551.61 466.81,1551.61 540,1478.43 v2(540,1106)
RST1: IC2.1 IC2.2 J2/4.10 | length 1722.7
  PWR w13: IC2.1 686.78,1152.84 994.94,1461 1918.45,1461 2029.56,1349.89 2100.11,1349.89 J2/4.10
  PWR w20: IC2.2 IC2.1
RX: IC1.14 R2.2 | length 105.9
  PWR w15: IC1.14 1429.3,1960 1452.76,1983.46 R2.2
SCLK: IC1.8 IC2.42 J2/4.5 | length 1868.4
  PWR w15: IC1.8 1380.3,1653.72 J2/4.5
  D2 w15: v1(1064,1088.18) 1176.89,1088.18 1589.71,1501 v1(1685,1501)
  GND w15: v1(1685,1501) 1685.5,1500.5 2049.5,1500.5 J2/4.5
TX1: IC1.4 R1.1 | length 364.3
  PWR w15: R1.1 923.27,1818.79 932.05,1810 IC1.4
TX2: C7.2 IC1.2 | length 143.2
  PWR w15: IC1.2 1165.73,1916.28 C7.2
VOUT: C9.1 C10.1 IC2.43 IC3.9 IC3.27
  other v1: 1068,1121 1117,1121
W: IC2.33 IC3.13 J2/4.13 | length 1373.4
  PWR w13: v1(1851.31,713) 1851.31,901.31 J2/4.13
  D1 w13: v1(1482,610) 1484.19,612.19 1807.99,612.19 v1(1810.17,614.37) ; v1@1810.17,610 1816,610 1851.31,645.31 v1(1851.31,713)
  D2 w13: v1(1121,801.78) 1204.22,801.78 v1(1238,768)
  GND w13: v1(1238,768) 1239,767 1239,749.62 1353.12,635.5 1456.5,635.5 v1(1482,610)
WDI: IC2.17 J2/4.19 | length 1812.7
  D1 w15: v1(622.24,642.61) 1051.39,642.61 1298.5,395.5 1841.89,395.5 1940.03,493.65 1940.03,690.03 J2/4.19
XTAL1: C5.1 IC1.6 Y1.1 | length 326.3
  PWR w15: C5.1 1010,1735.98 974.72,1700.71 Y1.1 974.72,1688.9 1013.3,1650.32 1013.3,1617.97 v2(1020,1611.28)
  D1 w15: v2@1022.64,1611.28 v2(1020,1611.28) 1020,1612.14 1117,1709.14 v1(1117,1710) ; v1@1121.36,1710 v1@1124,1710
XTAL2: C6.1 IC1.7 Y1.3 | length 247.7
  PWR w10: C6.1 1065.28,1480 Y1.3
  PWR w15: Y1.3 1083.37,1569.19 1119.7,1653.72 IC1.7

## Polygon pours and split planes (outlines as drawn)
GND on GND "GND_L04_P024" (solid, pour order 24): 0,0 2500,0 2500,1766 0,1766
GND on GND "GND_L04_P027" (solid, pour order 27): 1477,1959 1477,1693 1589,1693 1589,1925 1589,1959
VOUT on GND "VOUT_L04_P025" (solid, pour order 25): 1461.98,728 1732.92,728 1732.92,1380 1249,1380 1249,1215 965,1215 965,1071 1336.37,1071 1336.37,1247.52 1464.81,1247.52
VOUT on GND "VOUT_L04_P020" (solid, pour order 20): 1889,841.02 1889,777 1662,777 1662,839.63
VOUT on GND "VOUT_L04_P022" (solid, pour order 22): 1530,729 1285,729 1285,789 1530,789
GND on GND "GND_L04_P011" (solid, pour order 11): 1013,2001 1094,1999 1095,1892 1315,1885 1314,1725 1190,1723 1189,1838 1015,1841
+5 on PWR "+5_L01_P008" (solid, pour order 8): 1182.44,1910 1309.98,1910 1312,1761 1186,1761
+3V3 on PWR "+3V3_L01_P018" (solid, pour order 18): 1001.5,1269.91 1024.91,1269.91 1169,1269.91 1169,1137 1001.5,1137
+3V3 on PWR "+3V3_L01_P017" (solid, pour order 17): 1150,1398 1150,1224 1186,1224 1186,1186 1023,1186 1023,1398
+3V3 on PWR "+3V3_L01_P019" (solid, pour order 19): 1139,1213 1139,1075 1253,1075 1253,1213
+3V3 on D1 "+3V3_L02_P016" (solid, pour order 16): 395,1649 186,1649 186,1856 816,1856 816,1401 1131,1401 1131,1254 559,1254 559,1757 395,1757
+5 on D2 "+5_L03_P006" (solid, pour order 6): 397.5,1874.11 396.5,1639.84 668.51,1643.37 1326.82,1643.37 1346.17,1776 1310,1776 1307.28,1909.51 1187.71,1910.5 1185,1775 630,1772 632,1872

## Silkscreen, mask and mechanical layers (free items; w line width, h text height)
Top Overlay:
  text "+5" at 433.44,1765.04 h25
  text "+3V3" at 191,1757.5 h25
  text "GND" at 2222.79,1690.78 h25
  text "DOUT/DS" at 1812,1686 h25
  text "DQ7" at 2221.73,1598.06 h25
  text "RST" at 64,1584 h25
  text "DIN/A8" at 1841,1583.29 h25
  text "GND" at 521.73,1580.16 h25
  text "DQ6" at 2221.73,1492.77 h25
  text "DQ0" at 209,1486 h25
  text "SCLK/SQW" at 1786,1484 h25
  text "A7" at 535.12,1483.14 h25
  text "A9" at 1937.18,1391.67 h25
  text "DQ1" at 211,1387 h25
  text "DQ5" at 2221.73,1386.69 h25
  text "A6" at 535,1382 h25
  text "DQ2" at 210,1289 h25
  text "A5" at 531,1288 h25
  text "A11" at 1925.11,1283.76 h25
  text "RST1/RST2" at 2221.73,1282.18 h25
  text "A4" at 521.73,1211.85 h25
  text "G" at 1941,1191 h25
  text "IRQ" at 2221.73,1187.1 h25
  text "A18" at 207,1185 h25
  text "A16" at 208,1088 h25
  text "W" at 1941.41,1087.5 h25
  text "A17" at 2221.73,1087.3 h25
  text "A3" at 521.73,1054.89 h25
  text "DQ4" at 2282,989 h25
  text "A2" at 521.73,985.27 h25
  text "A10" at 1919,984 h25
  text "DQ3" at 166,983 h25
  text "E" at 1903,895 h25
  text "A15" at 2221.73,890.86 h25
  text "A14" at 209,887 h25
  text "A1" at 521.73,886.78 h25
  text "A13" at 2223,795 h25
  text "A12" at 211,783 h25
  text "WDI" at 1915,782 h25
  text "A0" at 521.73,779.17 h25